# Altium PCB PCB1.PcbDoc
Units mm, origin at the board's own origin, x right, y up, seen from the top; angles counter-clockwise.
Board outline 152.4 x 101.6 mm, 2 copper layers (Top Layer, Bottom Layer); 46 components, 28 nets, 174 pads, 0 vias.
Unrouted connection lines stored in the file: 92.
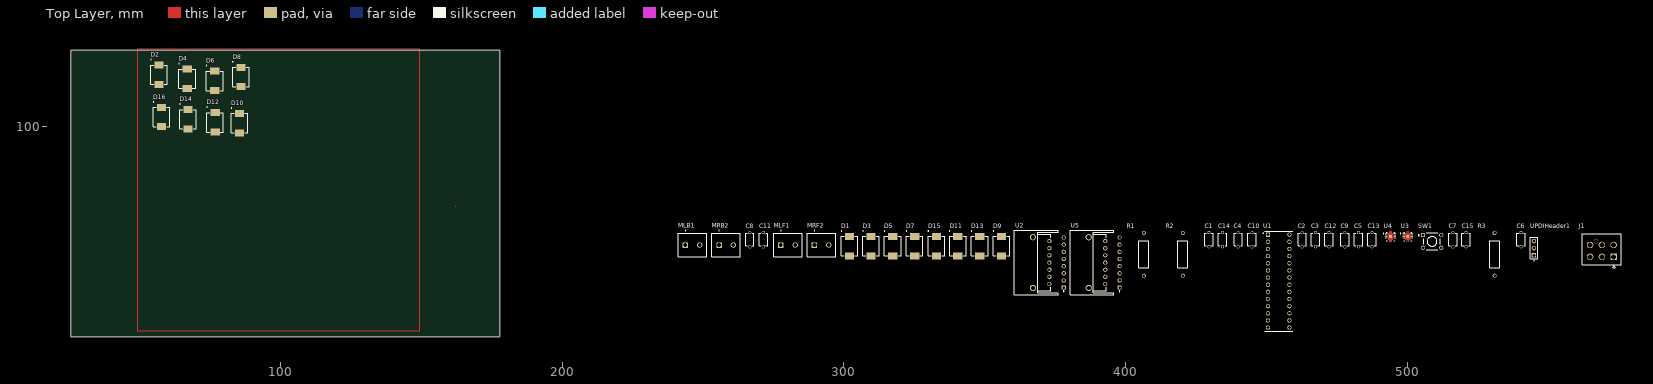
[diagram p0: Top Layer view]
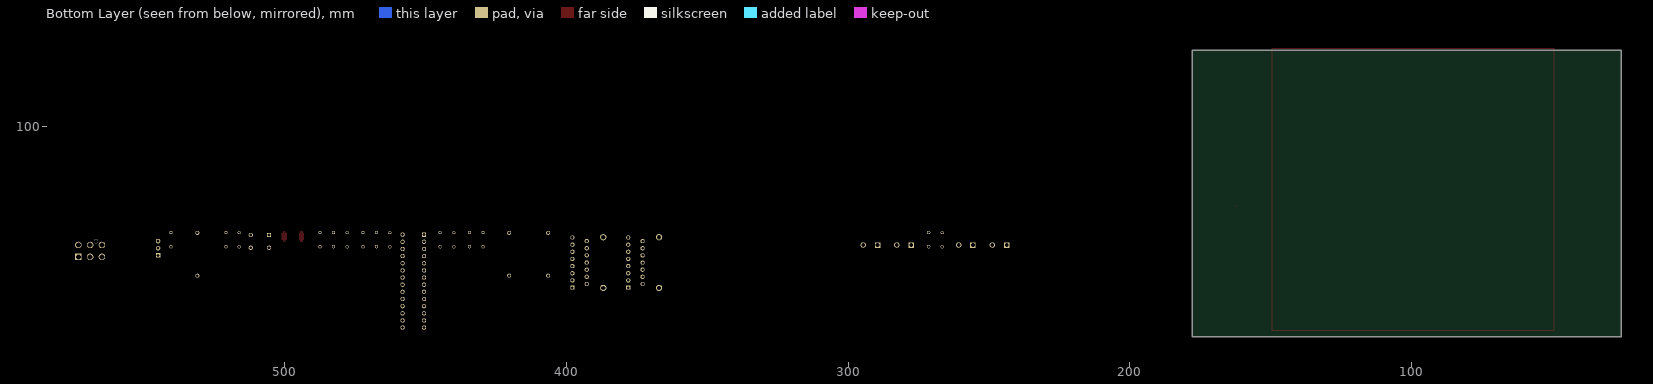
[diagram p1: Bottom Layer view, seen from below]

## Layer stack, top to bottom
Top Solder: solder mask 0.0102, Solder Resist, Dk 3.5
Top Layer: signal copper 0.0356
Dielectric 1: dielectric 0.32, FR-4, Dk 4.8
Bottom Layer: signal copper 0.0356
Bottom Solder: solder mask 0.0102, Solder Resist, Dk 3.5

## Board outline
25.4,25.4 177.8,25.4 177.8,127 25.4,127

## Design rules (kind name [scope] priority, off if disabled: settings)
Clearance [All] p1: gap=0.254 ignorepadtopadclearanceinfootprint=FALSE
PolygonConnect [All] p1: connectstyle=Relief reliefconductorwidth=0.254 reliefentries=4 polygonreliefangle="90 Angle" airgapwidth=0.254
RoutingVias [All] p1: holewidth=0.711 width=1.27 viastyle="Through Hole" minholewidth=0.711 minwidth=1.27 maxholewidth=0.711 maxwidth=1.27
SolderMaskExpansion [All] p1: expansion=0.102 istentingtop=FALSE
Width [All] p1: maxlimit=0.254 minlimit=0.254 preferedwidth=0.254
30 further rules are at their usual default settings.

## Components (designator, comment, footprint, x,y, rotation, side; value= is the part's Value field where it differs from the comment)
C1 "100nF" CAPRB500W50L450T300H550 429.641,59.817 r90 top
C2 "1μF" CAPRB500W50L450T300H550 462.788,59.817 r90 top
C3 "1μF" CAPRB500W50L450T300H550 467.487,59.817 r90 top
C4 "1nF" CAPRB500W50L450T300H550 440.055,59.817 r90 top
C5 "100nF" CAPRB500W50L450T300H550 482.727,59.817 r90 top
C6 "1μF" CAPRB500W50L450T300H550 540.512,59.817 r90 top
C7 "1μF" CAPRB500W50L450T300H550 516.255,59.817 r90 top
C8 "220μF" CAPRB500W50L450T300H550 266.573,59.817 r90 top
C9 "1μF" CAPRB500W50L450T300H550 477.901,59.817 r90 top
C10 "1nF" CAPRB500W50L450T300H550 444.881,59.817 r90 top
C11 "220μF" CAPRB500W50L450T300H550 271.399,59.817 r90 top
C12 "1μF" CAPRB500W50L450T300H550 472.313,59.817 r90 top
C13 "100nF" CAPRB500W50L450T300H550 487.553,59.817 r90 top
C14 "100nF" CAPRB500W50L450T300H550 434.467,59.817 r90 top
C15 "1μF" CAPRB500W50L450T300H550 520.954,59.817 r90 top
D1 "B340" DIO_B340-13-F 302.006,57.531 r90 top
D2 "B340" DIO_B340-13-F 56.769,118.343 r90 top
D3 "B340" DIO_B340-13-F 309.626,57.531 r90 top
D4 "B340" DIO_B340-13-F 66.802,116.967 r90 top
D5 "B340" DIO_B340-13-F 317.373,57.531 r90 top
D6 "B340" DIO_B340-13-F 76.581,116.205 r90 top
D7 "B340" DIO_B340-13-F 325.12,57.531 r90 top
D8 "B340" DIO_B340-13-F 85.852,117.581 r90 top
D9 "B340" DIO_B340-13-F 355.981,57.531 r90 top
D10 "B340" DIO_B340-13-F 85.344,101.198 r90 top
D11 "B340" DIO_B340-13-F 340.487,57.531 r90 top
D12 "B340" DIO_B340-13-F 76.708,101.452 r90 top
D13 "B340" DIO_B340-13-F 348.234,57.531 r90 top
D14 "B340" DIO_B340-13-F 67.056,102.595 r90 top
D15 "B340" DIO_B340-13-F 332.867,57.531 r90 top
D16 "B340" DIO_B340-13-F 57.658,103.378 r90 top
J1 "2125201006" MOLEX_2125201006 573.405,53.721 r0 top
MLB1 "Screw_Terminal_2_P5.00mm" "CUI_TB006 -508-02BE" 243.713,57.912 r0 top
MLF1 "Screw_Terminal_2_P5.00mm" "CUI_TB006 -508-02BE" 277.622,57.912 r0 top
MRB2 "Screw_Terminal_2_P5.00mm" "CUI_TB006 -508-02BE" 255.651,57.912 r0 top
MRF2 "Screw_Terminal_2_P5.00mm" "CUI_TB006 -508-02BE" 289.56,57.912 r0 top
R1 "54.5k" RESAD1520W70L1030D380 406.527,54.61 r90 top
R2 "54.5k" RESAD1520W70L1030D380 420.37,54.61 r90 top
R3 "1.2k" RESAD1520W70L1030D380 531.114,54.61 r90 top
SW1 "SW_Push" SW_FSM8JH 508.889,59.182 r0 top
U1 "AVR128DB28x-xSP" DIP762W60P254L3556H510Q28 454.406,45.085 r0 top
U2 "L298N" L298N_IC_HS 372.618,51.689 r0 top
U3 "TCKE812NA_RF" IC_TCKE812NA 500.253,60.96 r0 top
U4 "TCKE812NA_RF" IC_TCKE812NA 494.157,60.96 r0 top
U5 "L298N" L298N_IC_HS 392.43,51.689 r0 top
UPDIHeader1 "PINHD_1x3_Male" HARWIN_M20-9990345 545.084,56.769 r90 top

## Footprints (in the part's own frame and the unit in brackets; to place one, negate y for a bottom-side part, rotate by r counter-clockwise, add the part's x,y. Pads: shape width x height; smd on the part's side, far side on the other; paste and mask are expansions set on the pad)
CAPRB500W50L450T300H550 [mm]
  round 1.15 hole 0.8: 1(-2.5,0) 2(2.5,0)
  silkscreen extent -2.25,-1.5 2.25,1.5, body extent -2.75,-1.5 2.75,1.5, height 5.5
"CUI_TB006 -508-02BE" [mm]
  rect 1.95x1.95 / inner round 1.95 / far side rect 1.95x1.95 hole 1.3: 1(0,0)
  round 1.95 hole 1.3: 2(5.08,0)
  silkscreen extent -2.54,-4.1 7.62,5.2
DIO_B340-13-F [mm]
  rect 2.5x3.3 smd: A(-3.45,0) C(3.45,0)
  silkscreen extent -3.42,-2.95 5.5,3
DIP762W60P254L3556H510Q28 [mm]
  rect 1.508x1.508 hole 1: 1(-3.81,16.51)
  round 1.508 hole 1: 2(-3.81,13.97) 3(-3.81,11.43) 4(-3.81,8.89) 5(-3.81,6.35) 6(-3.81,3.81) 7(-3.81,1.27) 8(-3.81,-1.27) 9(-3.81,-3.81) 10(-3.81,-6.35) 11(-3.81,-8.89) 12(-3.81,-11.43) 13(-3.81,-13.97) 14(-3.81,-16.51) 15(3.81,-16.51) 16(3.81,-13.97) 17(3.81,-11.43) 18(3.81,-8.89) 19(3.81,-6.35) 20(3.81,-3.81) 21(3.81,-1.27) 22(3.81,1.27) 23(3.81,3.81) 24(3.81,6.35) 25(3.81,8.89) 26(3.81,11.43) 27(3.81,13.97) 28(3.81,16.51)
  silkscreen extent -5.55,-17.78 5,17.78
HARWIN_M20-9990345 [mm]
  rect 1.605x1.605 / inner round 1.605 / far side rect 1.605x1.605 hole 1.07: 1(-2.54,0)
  round 1.605 hole 1.07: 2(0,0) 3(2.54,0)
  silkscreen extent -4.47,-1.27 3.81,1.27, body extent -1.27,-1.27 6.35,1.27, height 7.37
IC_TCKE812NA [mm]
  rect 0.85x0.28 smd: 1(-1.475,1) 2(-1.475,0.5) 3(-1.475,0) 4(-1.475,-0.5) 5(-1.475,-1) 6(1.475,-1) 7(1.475,-0.5) 8(1.475,0) 9(1.475,0.5) 10(1.475,1)
  rect 1x1 smd paste-1 mask+0: 11(0,0)
  Top Layer region: 0.39,1.2 0.825,1.2 0.825,-1.2 0.39,-1.2 0.39,-1.9 0.11,-1.9 0.11,-1.2 -0.11,-1.2 -0.11,-1.9 -0.39,-1.9 -0.39,-1.2 -0.825,-1.2 -0.825,1.2 -0.39,1.2 -0.39,1.9 -0.11,1.9 -0.11,1.2 0.11,1.2 0.11,1.9 0.39,1.9
  silkscreen extent -2.6,-1.5 1.5,1.5, body extent -1.5,-1.5 1.5,1.5, height 0.75
L298N_IC_HS [mm]
  rect 1.5x1.5 hole 0.9: 1(5.465,-8.89)
  round 1.5 hole 0.9: 2(0.385,-7.62) 3(5.465,-6.35) 4(0.385,-5.08) 5(5.465,-3.81) 6(0.385,-2.54) 7(5.465,-1.27) 8(0.385,0) 9(5.465,1.27) 10(0.385,2.54) 11(5.465,3.81) 12(0.385,5.08) 13(5.465,6.35) 14(0.385,7.62) 15(5.465,8.89)
  round 2.2 hole 1.5: MH1(-5.465,9) MH2(-5.465,-9)
  silkscreen extent -12.04,-11.5 5.59,11.5, body extent -12.07,-11.52 5.73,11.48, height 24.2
MOLEX_2125201006 [mm]
  rect 2.3x2.3 / inner round 2.3 / far side rect 2.3x2.3 hole 1.8 mask+0.076: 1(0,0)
  round 2.3 hole 1.8 mask+0.076: 2(-4.2,0) 3(-8.4,0) 4(0,4.2) 5(-4.2,4.2) 6(-8.4,4.2)
  round 1.54 hole 1.54 unplated mask+0.076: ""(-6.3,5.46)
  silkscreen extent -11.1,-3.87 2.7,8.15
RESAD1520W70L1030D380 [mm]
  round 1.408 hole 0.9: 1(-7.6,0) 2(7.6,0)
  silkscreen extent -4.75,-1.8 4.75,1.8, body extent -1.4,-6.3 1.4,6.3, height 1.4
SW_FSM8JH [mm]
  rect 1.498x1.498 / inner round 1.498 / far side rect 1.498x1.498 hole 0.99: 1(-3.25,2.25)
  round 1.498 hole 0.99: 2(-3.25,-2.25) 3(3.25,2.25) 4(3.25,-2.25)
  silkscreen extent -4.95,-3 3,3, body extent -3,-3.95 3,3.95, height 9.5

## Part data
C1 C2 C3 C4 C5 C6 C7 C8 C9 C10 C11 C12 C13 C14 C15: library part C, Rating=V, Indicator=+
J1: MANUFACTURER=Molex, MAXIMUM_PACKAGE_HEIGHT=13.60mm, Package=None, Check_prices=https://www.snapeda.com/parts/212520-1006/Molex/view-part/?ref=eda, Description_1="\n                        \n                            MINI-FIT MAX 6 CIRCUIT HDR VERT | Molex Incorporated 212520-1006\n                        \n", DigiKey_Part_Number=900-2125201006-ND, MF=Molex, MP=212520-1006, PARTREV=B1, SnapEDA_Link=https://www.snapeda.com/parts/212520-1006/Molex/view-part/?ref=snap, STANDARD="Manufacturer Recommendations"
R1 R2 R3: library part R, Rating=W, Indicator=+
U3 U4: MANUFACTURER="Toshiba Semiconductor and Storage", MAXIMUM_PACKAGE_HEIGHT=0.75mm, Package="WFDFN-10 Toshiba Semiconductor and Storage", Availability="In Stock", Check_prices=https://www.snapeda.com/parts/TCKE812NA,RF/Toshiba/view-part/?ref=eda, Description_1="\n                        \n                            Fuse IC with Adjustable Over Current Protection and Reverse Current Blocking FET Control\n                        \n", MF="Toshiba Semiconductor and Storage", MP=TCKE812NA,RF, PARTREV=9.0, Price=None, SnapEDA_Link=https://www.snapeda.com/parts/TCKE812NA,RF/Toshiba/view-part/?ref=snap, STANDARD="Manufacturer Recommendations"

## Nets (pads, with @x,y where several pads share a name; then routed paths per layer and width w, separated by ;. In a path a pad name is that pad's centre, name@x,y a point inside that pad or via, vN(x,y) a via of type N, cw(c..) or ccw(c..) an arc to the next point about the centre after c; other vN are vias at no path point)
"5V Logic": C1.1 C6.1 C14.1 C15.1 J1.6 U1.6 U1.14 U1.20 U2.9 U5.9 UPDIHeader1.1
"7.2V Motor": C2.1 C8.1 C9.1 C11.1 J1.3 U3.2 U3.3 U3.4 U3.5 U4.2 U4.3 U4.4 U4.5
GND: C1.2 C2.2 C3.2 C4.2 C5.2 C6.2 C7.1 C8.2 C9.2 C10.2 C11.2 C12.2 C13.2 C14.2 C15.2 J1.2 R1.1 R2.1 SW1.1 U1.15 U1.21 U2.1 U2.8 U2.15 U3.11 U4.11 U5.1 U5.8 U5.15 UPDIHeader1.2
LBWD: U1.8 U2.7 U2.12
LFWD: U1.7 U2.5 U2.10
LPWM: U1.22 U2.6 U2.11
NetC3_1: C3.1 C5.1 U2.4 U4.6 U4.7 U4.8
NetC4_1: C4.1 U4.1
NetC7_2: C7.2 SW1.2 U1.18
NetC10_1: C10.1 U3.1
NetC12_1: C12.1 C13.1 U3.6 U3.7 U3.8 U5.4
NetD1_2: MLF1.1 U2.2
NetD3_2: MLF1.2 U2.3
NetD5_2: MLB1.1 U2.13
NetD7_2: MLB1.2 U2.14
NetD9_2: MRF2.1 U5.2
NetD11_2: MRF2.2 U5.3
NetD13_2: MRB2.1 U5.13
NetD15_2: MRB2.2 U5.14
NetR1_2: R1.2 U4.10
NetR2_2: R2.2 U3.10
NetR3_1: R3.1 UPDIHeader1.3
NetR3_2: R3.2 U1.19
RBWD: U1.10 U1.11 U5.7 U5.12
RFWD: U1.9 U5.5 U5.10
RPWM: U1.23 U5.6 U5.11
SCL: J1.1 U1.25
SDA: J1.4 U1.24
pads on no net: D1.A D1.C D2.A D2.C D3.A D3.C D4.A D4.C D5.A D5.C D6.A D6.C D7.A D7.C D8.A D8.C D9.A D9.C D10.A D10.C D11.A D11.C D12.A D12.C D13.A D13.C D14.A D14.C D15.A D15.C D16.A D16.C J1. J1.5 SW1.3 SW1.4 U1.1 U1.2 U1.3 U1.4 U1.5 U1.12 U1.13 U1.16 U1.17 U1.26 U1.27 U1.28 U2.MH1 U2.MH2 U3.9 U4.9 U5.MH1 U5.MH2
copper on no net: | length 401.1
  Top Layer w0.254: 161.925,71.628 162.179,71.628 ; 49.149,27.432 149.352,27.432 149.352,127.635 49.149,127.635 49.149,27.432

## Text inside footprints (layer, text, board x,y; h text height)
J1: Mechanical 13 "PTH D1.80 +/- 0.04" at 561.016,46.721 h0.5; Mechanical 13 "NPTH D1.54 +/- 0.04" at 561.016,45.721 h0.5